# EAGLE board PCB-CMB-6 (EAGLE 7.3.0), part 1 of 2
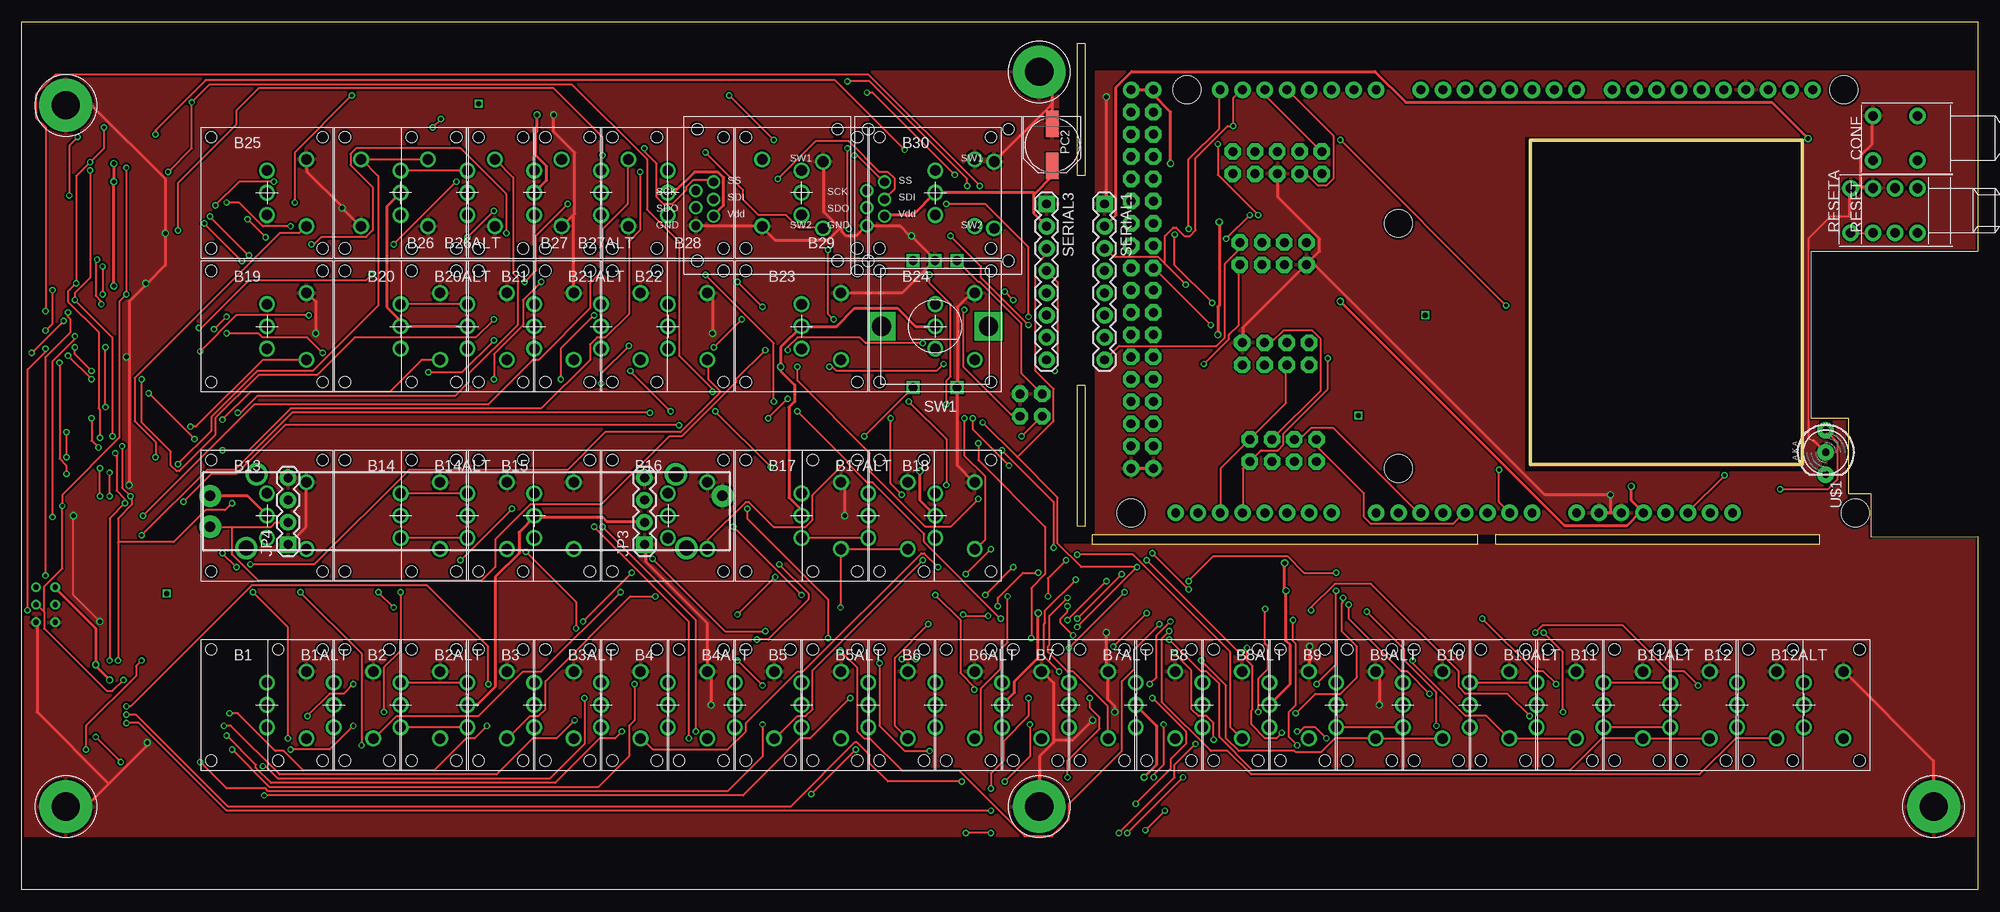
[diagram p0: board, top side]
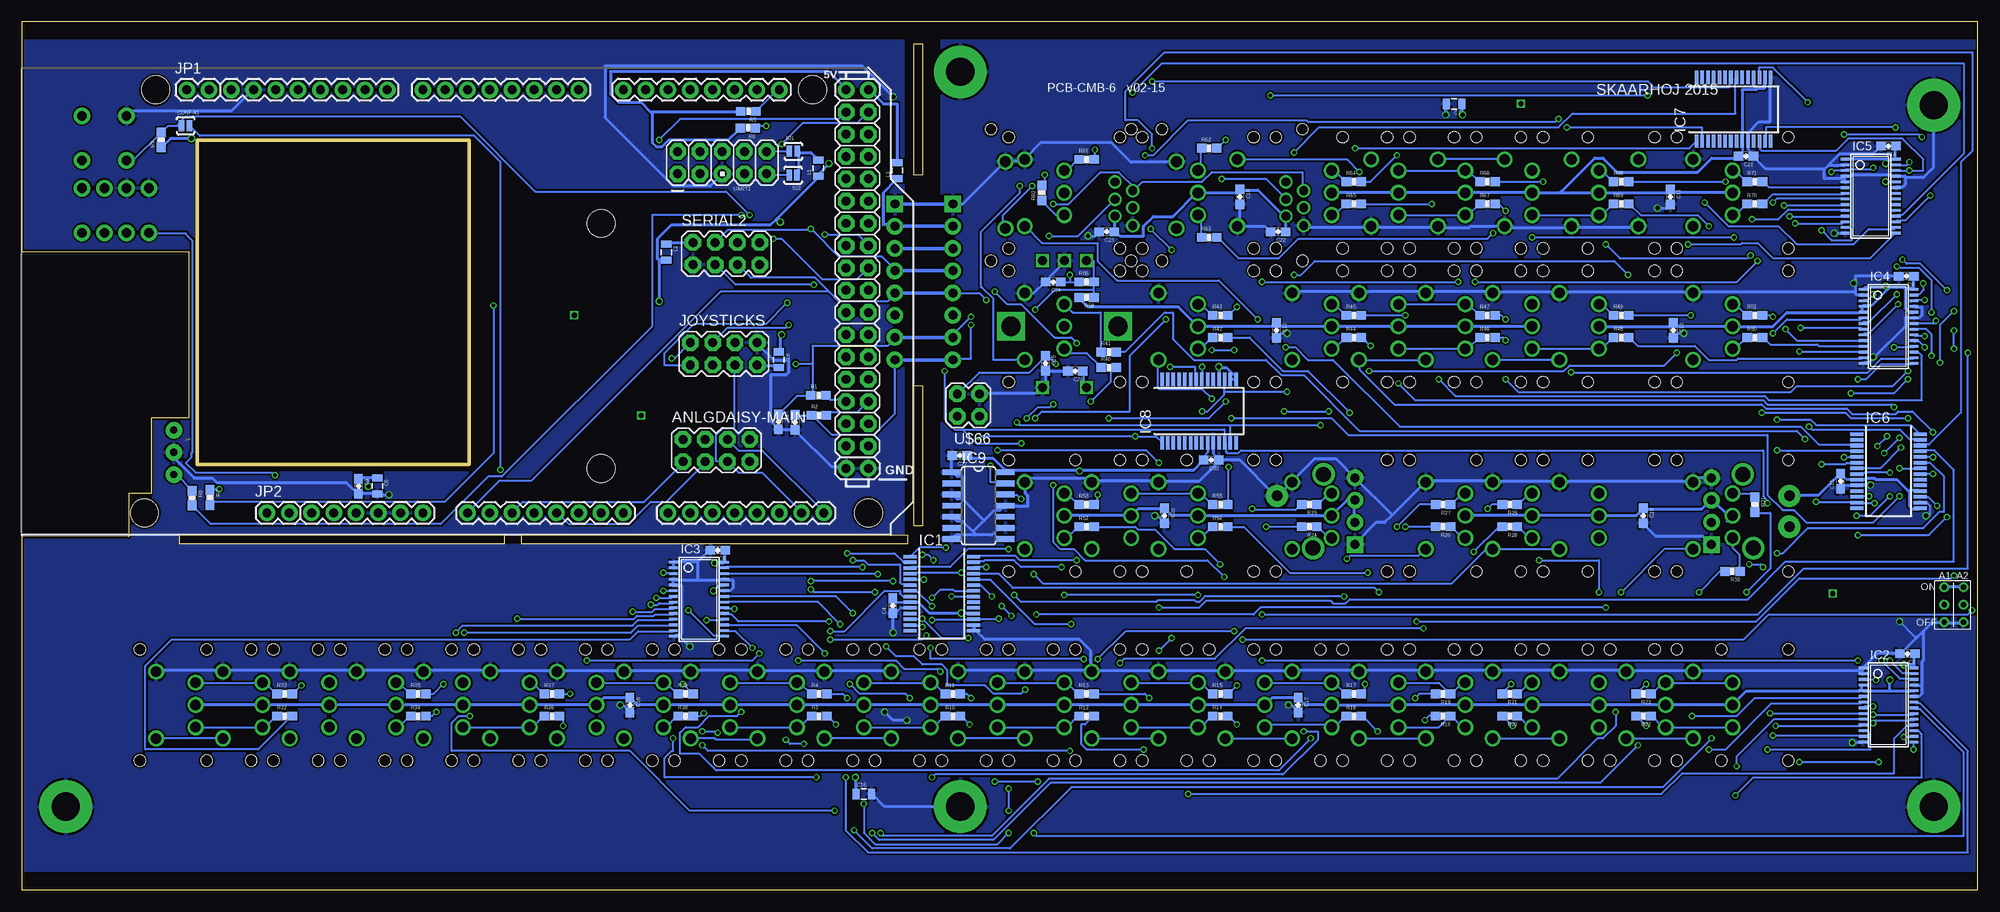
[diagram p1: board, bottom side, seen from below]

Size 223 x 99 mm. Coordinates in mm from the lower left corner, seen from the top.
Outline: 0,0 0,99 223,99 223,72.82 204,72.82 204,53.82 208.28,53.82 208.28,45.22 210.82,45.2 210.82,40.27 223,40.3 223,0 0,0
Copper layers (1*16): Top 0.035mm / dielectric 1.5mm / Bottom 0.035mm
Design rules "Fusion_eagle_rule_v1.1": minimum track width 6mil, minimum drill 12mil, track to track 6mil, track to pad 6mil, pad to pad 6mil, via to via 6mil, smd to smd 0mil, copper to edge 10mil, drill to drill 10mil, minimum pad ring 10mil, minimum via ring 6mil, stop-mask expansion 2mil, vias tented up to drill 100mil, thermal gap 10mil
Net classes: 0 default: width 0.203 mm, drill 0.406 mm, clearance 0.203 mm; 1 Power: width 0.356 mm, drill 0.508 mm, clearance 0.203 mm
tRestrict: area 0,-0.5 to 223,6; area 0,93.5 to 223,99.5; area 118.3,39.5 to 122.3,99.5; area 121,39.5 to 205,40.5; area 171.4,47.8 to 203.2,85.9
bRestrict: area 0,97 to 223,99.5; area 0,-0.5 to 223,2; area 118.3,39.5 to 122.3,99.5; area 121,39.5 to 205,40.5; area 171.4,47.8 to 203.2,85.9
Milling: area 168,39.5 to 205,40.5; area 120.3,81.5 to 121.3,96.5; area 120.3,41.5 to 121.3,57.5; area 122,39.5 to 166,40.5; 4 lines

## Footprints (pad centres in the part's own frame; a part is rotated, then mirrored left to right if it is on the bottom)
2X4 = drill 1.016 pad 1.88 octagon: 1 -3.81,-1.27; 2 -3.81,1.27; 3 -1.27,-1.27; 4 -1.27,1.27; 5 1.27,-1.27; 6 1.27,1.27; 7 3.81,-1.27; 8 3.81,1.27
LP11 = drill 1.2: COM 0,0; P$2 0,2.54; P$3 0,-2.54; P$4 4.5,3.81; P$5 4.5,-3.81 | hole 1.3: -6.35,6.35; 6.35,6.35; 6.35,-6.35; -6.35,-6.35
0603-CAP = smd 1.1 x 1: 1 -0.85,0; 2 0.85,0
0805 = smd 0.8 x 1.2: 1 -0.9,0; 2 0.9,0
PUSHBUTTON = drill 1.1 pad 1.88: 1 2.54,2.54; 2 2.54,-2.54; 3 -2.54,2.54; 4 -2.54,-2.54
SJ_2S-NO = smd 0.635 x 1.27: 1 -0.45,0; 2 0.45,0
SSOP28 = smd 0.4 x 1.5: 1 -4.225,-3.625; 2 -3.575,-3.625; 3 -2.925,-3.625; 4 -2.275,-3.625; 5 -1.625,-3.625; 6 -0.975,-3.625; 7 -0.325,-3.625; 8 0.325,-3.625; 9 0.975,-3.625; 10 1.625,-3.625; 11 2.275,-3.625; 12 2.925,-3.625; 13 3.575,-3.625; 14 4.225,-3.625; 15 4.225,3.625; 16 3.575,3.625; 17 2.925,3.625; 18 2.275,3.625; 19 1.625,3.625; 20 0.975,3.625; 21 0.325,3.625; 22 -0.325,3.625; 23 -0.975,3.625; 24 -1.625,3.625; 25 -2.275,3.625; 26 -2.925,3.625; 27 -3.575,3.625; 28 -4.225,3.625
TSSOP28 = smd 0.305 x 0.991: 1 -4.225,-2.918; 2 -3.575,-2.918; 3 -2.925,-2.918; 4 -2.275,-2.918; 5 -1.625,-2.918; 6 -0.975,-2.918; 7 -0.325,-2.918; 8 0.325,-2.918; 9 0.975,-2.918; 10 1.625,-2.918; 11 2.275,-2.918; 12 2.925,-2.918; 13 3.575,-2.918; 14 4.225,-2.918; 15 4.225,2.918; 16 3.575,2.918; 17 2.925,2.918; 18 2.275,2.918; 19 1.625,2.918; 20 0.975,2.918; 21 0.325,2.918; 22 -0.325,2.918; 23 -0.975,2.918; 24 -1.625,2.918; 25 -2.275,2.918; 26 -2.925,2.918; 27 -3.575,2.918; 28 -4.225,2.918
SO14 = smd 0.66 x 2.032: 1 -3.81,-3.073; 2 -2.54,-3.073; 3 -1.27,-3.073; 4 0,-3.073; 5 1.27,-3.073; 6 2.54,-3.073; 7 3.81,-3.073; 8 3.81,3.073; 9 2.54,3.073; 10 1.27,3.073; 11 0,3.073; 12 -1.27,3.073; 13 -2.54,3.073; 14 -3.81,3.073
1X02 = drill 1.016 pad 1.88: 1 0,0; 2 2.54,0
1X04 = drill 1.016 pad 1.88 square: 1 0,0 | drill 1.016 pad 1.88: 2 2.54,0; 3 5.08,0; 4 7.62,0
PANASONIC_D = smd 3 x 1.4: + 2.4,0; - -2.4,0
SLIDER45 = drill 1.194 pad 2.54: 1 -29.21,1.75; 2A -29.21,-1.75; 3 29.21,1.75 | drill 1.702: P$1 -23.9,4.2; P$2 23.9,4.2; P$3 25.1,-4.2; P$4 -25.1,-4.2
0603-RES = smd 1.1 x 1: 1 -0.85,0; 2 0.85,0
1X08 = drill 1.016 pad 1.88 square: 1 0,0 | drill 1.016 pad 1.88: 2 2.54,0; 3 5.08,0; 4 7.62,0; 5 10.16,0; 6 12.7,0; 7 15.24,0; 8 17.78,0
SMART_SWITCH = drill 1.2: 1 6.35,3.81; 2 6.35,-3.81 | drill 1: 3 -8.153,-3.48; 4 -6.147,-2.413; 5 -8.153,-1.422; 6 -6.147,-0.483; 7 -8.153,0.508; 8 -6.147,1.499 | hole 1.3: -8.001,7.506; 8.001,7.506; 8.001,-7.506; -8.001,-7.506
ALPS_EC12E_SW = drill 1 square: A -2.5,-7.5; B 2.5,-7.5; C 0,-7.5; D -2.5,7; E 2.5,7 | drill 2.2 square: GND1 -6.1,0; GND2 6.1,0
ARDUINO_MEGA = drill 1.016 pad 1.88: 0 63.5,50.8; 1 60.96,50.8; 2 58.42,50.8; 3 55.88,50.8; 3.3V 35.56,2.54; 4 53.34,50.8; 5 50.8,50.8; 5V@0 38.1,2.54; 5V@1 93.98,50.8; 5V@2 96.52,50.8; 6 48.26,50.8; 7 45.72,50.8; 8 41.656,50.8; 9 39.116,50.8; 10 36.576,50.8; 11 34.036,50.8; 12 31.496,50.8; 13 28.956,50.8; 14 68.58,50.8; 15 71.12,50.8; 16 73.66,50.8; 17 76.2,50.8; 18 78.74,50.8; 19 81.28,50.8; 20 83.82,50.8; 21 86.36,50.8; A0 50.8,2.54; A1 53.34,2.54; A2 55.88,2.54; A3 58.42,2.54; A4 60.96,2.54; A5 63.5,2.54; A6 66.04,2.54; A7 68.58,2.54; A8 73.66,2.54; A9 76.2,2.54; A10 78.74,2.54; A11 81.28,2.54; A12 83.82,2.54; A13 86.36,2.54; A14 88.9,2.54; A15 91.44,2.54; AREF 23.876,50.8; GND@0 40.64,2.54; GND@1 43.18,2.54; GND@2 93.98,7.62; GND@3 96.52,7.62; GND@4 26.416,50.8; RESET 33.02,2.54; VIN 45.72,2.54 | drill 1.016 pad 1.88 octagon: 22 93.98,48.26; 23 96.52,48.26; 24 93.98,45.72; 25 96.52,45.72; 26 93.98,43.18; 27 96.52,43.18; 28 93.98,40.64; 29 96.52,40.64; 30 93.98,38.1; 31 96.52,38.1; 32 93.98,35.56; 33 96.52,35.56; 34 93.98,33.02; 35 96.52,33.02; 36 93.98,30.48; 37 96.52,30.48; 38 93.98,27.94; 39 96.52,27.94; 40 93.98,25.4; 41 96.52,25.4; 42 93.98,22.86; 43 96.52,22.86; 44 93.98,20.32; 45 96.52,20.32; 46 93.98,17.78; 47 96.52,17.78; 48 93.98,15.24; 49 96.52,15.24; 50 93.98,12.7; 51 96.52,12.7; 52 93.98,10.16; 53 96.52,10.16 | hole 3.2: 15.24,50.8; 13.97,2.54; 66.04,35.56; 66.04,7.62; 90.17,50.8; 96.52,2.54
LED5MM-BICOLOR = drill 0.813 pad 1.88: A2 2.54,0; A3 -2.54,0; K1 0,0
3.2MMPAD6MM = drill 3.2 pad 6: P$1 0,0
2BITADDR = drill 0.6: A1 0,0; A2 2.2,0; H2 0,2; H3 2.2,2; L2 0,-2; L3 2.2,-2
2X2 = drill 1.016 pad 1.88 octagon: 1 -3.81,-1.27; 2 -3.81,1.27; 3 -1.27,-1.27; 4 -1.27,1.27
AVR_ICSP = drill 1.016 pad 1.88 octagon: 1 -1.27,5.08; 2 1.27,5.08; 3 -1.27,2.54; 4 1.27,2.54; 5 -1.27,0; 6 1.27,0; 7 -1.27,-2.54; 8 1.27,-2.54; 9 -1.27,-5.08; 10 1.27,-5.08

## Placement (x,y rotation side)
ANLGDAISY-MAIN  M04X2  [2X4]  143.82,50.12 0 bottom
B1  LP11-B"  [LP11]  27.94,21.09 0 top
B1ALT  LP11-B"  [LP11]  35.56,21.09 0 top
B2  LP11-B"  [LP11]  43.18,21.09 0 top
B2ALT  LP11-B"  [LP11]  50.8,21.09 0 top
B3  LP11-B"  [LP11]  58.42,21.09 0 top
B3ALT  LP11-B"  [LP11]  66.04,21.09 0 top
B4  LP11-B"  [LP11]  73.66,21.09 0 top
B4ALT  LP11-B"  [LP11]  81.28,21.09 0 top
B5  LP11-B"  [LP11]  88.9,21.09 0 top
B5ALT  LP11-B"  [LP11]  96.52,21.09 0 top
B6  LP11-B"  [LP11]  104.14,21.09 0 top
B6ALT  LP11-B"  [LP11]  111.76,21.09 0 top
B7  LP11-B"  [LP11]  119.38,21.09 0 top
B7ALT  LP11-B"  [LP11]  127,21.09 0 top
B8  LP11-B"  [LP11]  134.62,21.09 0 top
B8ALT  LP11-B"  [LP11]  142.24,21.09 0 top
B9  LP11-B"  [LP11]  149.86,21.09 0 top
B9ALT  LP11-B"  [LP11]  157.48,21.09 0 top
B10  LP11-B"  [LP11]  165.1,21.09 0 top
B10ALT  LP11-B"  [LP11]  172.72,21.09 0 top
B11  LP11-B"  [LP11]  180.34,21.09 0 top
B11ALT  LP11-B"  [LP11]  187.96,21.09 0 top
B12  LP11-B"  [LP11]  195.58,21.09 0 top
B12ALT  LP11-B"  [LP11]  203.2,21.09 0 top
B13  LP11-B"  [LP11]  27.94,42.68 0 top
B14  LP11-B"  [LP11]  43.18,42.68 0 top
B14ALT  LP11-B"  [LP11]  50.8,42.68 0 top
B15  LP11-B"  [LP11]  58.42,42.68 0 top
B16  LP11-B"  [LP11]  73.66,42.68 0 top
B17  LP11-B"  [LP11]  88.9,42.68 0 top
B17ALT  LP11-B"  [LP11]  96.52,42.68 0 top
B18  LP11-B"  [LP11]  104.14,42.68 0 top
B19  LP11-B"  [LP11]  27.94,64.27 0 top
B20  LP11-B"  [LP11]  43.18,64.27 0 top
B20ALT  LP11-B"  [LP11]  50.8,64.27 0 top
B21  LP11-B"  [LP11]  58.42,64.27 0 top
B21ALT  LP11-B"  [LP11]  66.04,64.27 0 top
B22  LP11-B"  [LP11]  73.66,64.27 0 top
B23  LP11-B"  [LP11]  88.9,64.27 0 top
B24  LP11-B"  [LP11]  104.14,64.27 0 top
B25  LP11-B"  [LP11]  27.94,79.51 0 top
B26  LP11-B"  [LP11]  43.18,79.51 180 top
B26ALT  LP11-B"  [LP11]  50.8,79.51 180 top
B27  LP11-B"  [LP11]  58.42,79.51 180 top
B27ALT  LP11-B"  [LP11]  66.04,79.51 180 top
B28  LP11-B"  [LP11]  73.66,79.51 180 top
B29  LP11-B"  [LP11]  88.9,79.51 180 top
B30  LP11-B"  [LP11]  104.14,79.51 0 top
C1  220pF?  [0603-CAP]  136.75,53.39 270 bottom
C2  220pF?  [0603-CAP]  134.84,53.32 270 bottom
C3  100nF  [0603-CAP]  184.63,46.02 270 bottom
C4  100nF  [0603-CAP]  123.7,32.39 90 bottom
C5  100nF  [0603-CAP]  8,26.93 180 bottom
C6  22uF  [0805]  182.47,46.07 270 bottom
C7  22uF  [0805]  59.69,89.67 180 bottom
C8  100nF  [0603-CAP]  143.64,38.74 180 bottom
C9  100nF  [0603-CAP]  8.13,69.98 180 bottom
C10  100nF  [0603-CAP]  84.12,79.05 270 bottom
C11  100nF  [0603-CAP]  35.05,79.05 270 bottom
C12  100nF  [0603-CAP]  79.96,63.81 270 bottom
C13  100nF  [0603-CAP]  34.7,63.81 270 bottom
C14  100nF  [0603-CAP]  10.16,84.84 180 bottom
C15  100nF  [0603-CAP]  15.62,46.62 90 bottom
C16  22uF  [0805]  127,10.93 0 bottom
C17  100nF  [0603-CAP]  77.47,21.09 270 bottom
C18  100nF  [0603-CAP]  153.67,21.09 270 bottom
C19  100nF  [0603-CAP]  38.1,42.68 270 bottom
C20  100nF  [0603-CAP]  92.71,42.68 270 bottom
C21  100nF  [0603-CAP]  26.42,83.7 180 bottom
C22  100nF  [0603-CAP]  79.76,75.06 180 bottom
C23  100nF  [0603-CAP]  99.31,75.06 180 bottom
C24  10nF  [0603-CAP]  105.41,69.35 180 bottom
C25  10nF  [0603-CAP]  106.3,60.08 270 bottom
C26  10nF  [0603-CAP]  102.87,59.19 180 bottom
C27  100nF  [0603-CAP]  116.08,49.54 180 bottom
C30  100nF  [0603-CAP]  87.38,49.03 180 bottom
CONF  [PUSHBUTTON]  213.6,85.75 90 top
CONF-A1  SOLDERJUMPERNO  [SJ_2S-NO]  204.34,87.16 0 bottom
IC1  MCP23017SS  [SSOP28]  118.11,33.79 270 bottom
IC2  PCA9685  [TSSOP28]  10.16,21.09 270 bottom
IC3  PCA9685  [TSSOP28]  145.8,33.16 270 bottom
IC4  PCA9685  [TSSOP28]  10.16,64.27 270 bottom
IC5  PCA9685  [TSSOP28]  12.19,79.13 270 bottom
IC6  MCP23017SS  [SSOP28]  10.16,47.76 270 bottom
IC7  MCP23017SS  [SSOP28]  27.81,89.03 0 bottom
IC8  MCP23017SS  [SSOP28]  88.77,54.62 0 bottom
IC9  74HCT14D  [SO14]  113.92,43.82 270 bottom
JOYSTICKS  M04X2  [2X4]  142.97,61.14 0 bottom
JP1  [1X02]  204.2,91.26 0 bottom
JP2  [1X02]  195.06,43 0 bottom
JP3  [1X04]  70.99,39.38 90 top
JP4  [1X04]  30.35,39.38 90 top
L1  [0805]  132.19,82.31 90 bottom
L2  [0805]  149.5,72.73 270 bottom
L3  [0805]  123.19,82.05 90 bottom
L6  [0805]  136.67,60.47 270 bottom
PC2  47u  [PANASONIC_D]  117.47,84.97 270 top
POT1  SLIDER45  [SLIDER45]  50.67,43.19 0 top
R1  ?  [0603-RES]  132.18,56.43 0 bottom
R2  ?  [0603-RES]  132.12,54.14 0 bottom
R3  270  [0603-RES]  132.08,19.82 0 bottom
R4  270  [0603-RES]  132.08,22.36 0 bottom
R5  1K5  [0603-RES]  140.16,88.8 180 bottom
R6  1K5  [0603-RES]  140.22,86.89 180 bottom
R7  270R  [0603-RES]  201.57,44.76 270 bottom
R8  270R  [0603-RES]  203.6,44.7 270 bottom
R9  10K  [0603-RES]  207.12,85.56 90 bottom
R10  270  [0603-RES]  116.84,19.82 0 bottom
R11  270  [0603-RES]  116.84,22.36 0 bottom
R12  270  [0603-RES]  101.6,19.82 0 bottom
R13  270  [0603-RES]  101.6,22.36 0 bottom
R14  270  [0603-RES]  86.36,19.82 0 bottom
R15  270  [0603-RES]  86.36,22.36 0 bottom
R16  270  [0603-RES]  71.12,19.82 0 bottom
R17  270  [0603-RES]  71.12,22.36 0 bottom
R18  270  [0603-RES]  60.96,19.82 180 bottom
R19  270  [0603-RES]  60.96,22.36 180 bottom
R20  270  [0603-RES]  53.34,19.82 180 bottom
R21  270  [0603-RES]  53.34,22.36 180 bottom
R22  270  [0603-RES]  38.1,19.82 180 bottom
R23  270  [0603-RES]  38.1,22.36 180 bottom
R24  270  [0603-RES]  76.2,41.41 180 bottom
R25  270  [0603-RES]  76.2,43.95 180 bottom
R26  270  [0603-RES]  60.96,41.41 180 bottom
R27  270  [0603-RES]  60.96,43.95 180 bottom
R28  270  [0603-RES]  53.34,41.41 180 bottom
R29  270  [0603-RES]  53.34,43.95 180 bottom
R30  270  [0603-RES]  27.94,36.33 180 bottom
R31  270  [0603-RES]  25.4,43.95 270 bottom
R32  270  [0603-RES]  193.04,19.82 0 bottom
R33  270  [0603-RES]  193.04,22.36 0 bottom
R34  270  [0603-RES]  177.8,19.82 0 bottom
R35  270  [0603-RES]  177.8,22.36 0 bottom
R36  270  [0603-RES]  162.56,19.82 0 bottom
R37  270  [0603-RES]  162.56,22.36 0 bottom
R38  270  [0603-RES]  147.32,19.82 0 bottom
R39  270  [0603-RES]  147.32,22.36 0 bottom
R40  270  [0603-RES]  99.06,59.57 0 bottom
R41  270  [0603-RES]  99.06,61.35 0 bottom
R42  270  [0603-RES]  86.36,63 0 bottom
R43  270  [0603-RES]  86.36,65.54 0 bottom
R44  270  [0603-RES]  71.12,63 0 bottom
R45  270  [0603-RES]  71.12,65.54 0 bottom
R46  270  [0603-RES]  55.88,63 0 bottom
R47  270  [0603-RES]  55.88,65.54 0 bottom
R48  270  [0603-RES]  40.64,63 0 bottom
R49  270  [0603-RES]  40.64,65.54 0 bottom
R50  270  [0603-RES]  25.4,63 0 bottom
R51  270  [0603-RES]  25.4,65.54 0 bottom
R52  270  [0603-RES]  101.6,41.41 0 bottom
R53  270  [0603-RES]  101.6,43.95 0 bottom
R54  270  [0603-RES]  86.36,41.41 0 bottom
R55  270  [0603-RES]  86.36,43.95 0 bottom
R56  0R  [0603-RES]  101.6,69.35 0 bottom
R58  100K  [0603-RES]  101.6,67.57 180 bottom
R60  270  [0603-RES]  106.68,79.51 90 bottom
R61  270  [0603-RES]  101.6,83.32 0 bottom
R62  270  [0603-RES]  87.63,84.59 0 bottom
R63  270  [0603-RES]  87.63,74.43 0 bottom
R64  270  [0603-RES]  71.12,80.78 0 bottom
R65  270  [0603-RES]  71.12,78.24 0 bottom
R66  270  [0603-RES]  55.88,80.78 0 bottom
R67  270  [0603-RES]  55.88,78.24 0 bottom
R68  270  [0603-RES]  40.64,80.78 0 bottom
R69  270  [0603-RES]  40.64,78.24 0 bottom
R70  270  [0603-RES]  25.4,78.24 0 bottom
R71  270  [0603-RES]  25.4,80.78 0 bottom
RESET  [PUSHBUTTON]  213.6,77.49 90 top
RESETA  [PUSHBUTTON]  211.06,77.49 90 top
SERIAL1  [1X08]  123.44,78.24 270 top
SERIAL2  M04X2  [2X4]  142.68,72.57 0 bottom
SERIAL3  [1X08]  116.84,78.24 270 top
SJ1  SOLDERJUMPERNO  [SJ_2S-NO]  135.03,84.24 0 bottom
SJ2  SOLDERJUMPERNO  [SJ_2S-NO]  135.07,81.51 180 bottom
SSW1  SMART_SWITCHSMART_SWITCH_8PIN  [SMART_SWITCH]  85,79.25 0 top
SSW2  SMART_SWITCHSMART_SWITCH_8PIN  [SMART_SWITCH]  104.5,79.25 0 top
SW1  EC12E_SW  [ALPS_EC12E_SW]  104.12,64.29 180 top
U1  ARDUINO-MEGAFULL  [ARDUINO_MEGA]  223,40.46 0 bottom
U$1  LEDBICOLOR-AKA  [LED5MM-BICOLOR]  205.69,49.91 270 top
U$7  GNDPAD6MM  [3.2MMPAD6MM]  218,9.5 0 top
U$15  GNDPAD6MM  [3.2MMPAD6MM]  116,9.5 0 top
U$18  GNDPAD6MM  [3.2MMPAD6MM]  116,93.31 0 top
U$20  GNDPAD6MM  [3.2MMPAD6MM]  5,9.5 0 top
U$21  GNDPAD6MM  [3.2MMPAD6MM]  5,89.5 0 top
U$34  2BITADDR  [2BITADDR]  3.81,32.52 0 bottom
U$66  M02X2  [2X2]  117.62,55.29 180 bottom
UART1  M05X2PTH  [AVR_ICSP]  143.15,82.95 90 bottom

## Library data of the parts
ANLGDAISY-MAIN C1-C27 C30 CONF-A1 JOYSTICKS JP1-JP4 L1-L3 L6 R1-R56 R58 R60-R71 SERIAL1-SERIAL3 SJ1 SJ2 UART1 = SparkFun
B1 B1ALT B2 B2ALT B3 B3ALT B4 B4ALT B5 B5ALT B6 B6ALT B7 B7ALT B8 B8ALT B9 B9ALT B10 B10ALT B11 B11ALT B12 B12ALT B13 B14 B14ALT B15-B17 B17ALT B18-B20 B20ALT B21 B21ALT B22-B26 B26ALT B27 B27ALT B28-B30 CONF POT1 RESET RESETA SSW1 SSW2 U1 U$1 U$7 U$15 U$18 U$20 U$21 U$34 U$66 = SKAARHOJ
IC1 IC6-IC8 = microchip; MF: MICROCHIP; MPN: MCP23017-E/SS; OC_FARNELL: 1467674; OC_NEWARK: 31K2960
IC2-IC5 = wsmith
IC9 = 74xx-eu
PC2 = rcl
SW1 = switch-alps; MPN: EC12E2424407; OC_FARNELL: 1520813; OC_NEWARK: 74M1068

## Nets
5V [Power]: B1.COM B1ALT.COM B2.COM B2ALT.COM B3.COM B3ALT.COM B4.COM B4ALT.COM B5.COM B5ALT.COM B6.COM B6ALT.COM B7.COM B7ALT.COM B8.COM B8ALT.COM B9.COM B9ALT.COM B10.COM B10ALT.COM B11.COM B11ALT.COM B12.COM B12ALT.COM B13.COM B14.COM B14ALT.COM B15.COM B16.COM B17.COM B17ALT.COM B18.COM B19.COM B20.COM B20ALT.COM B21.COM B21ALT.COM B22.COM B23.COM B24.COM B25.COM B26.COM B26ALT.COM B27.COM B27ALT.COM B28.COM B29.COM B30.COM C4.2 C5.1 C7.1 C8.1 C9.1 C10.1 C11.1 C12.1 C13.1 C14.1 C15.2 C16.1 C17.1 C18.1 C19.1 C20.1 C21.2 C22.1 C23.1 C27.1 C30.2 IC1.9 IC1.18 IC2.4 IC2.5 IC2.24 IC2.28 IC3.24 IC3.28 IC4.1 IC4.4 IC4.5 IC4.24 IC4.28 IC5.1 IC5.24 IC5.28 IC6.9 IC6.15 IC6.18 IC7.9 IC7.16 IC7.18 IC8.9 IC8.15 IC8.16 IC8.18 IC9.14 JP3.2 JP3.3 JP4.3 L3.1 PC2.+ POT1.1 R9.1 R58.2 SERIAL1.2 SERIAL3.2 SSW1.4 SSW2.4 U$34.H2 U$34.H3
5V_RAW [Power]: C3.1 C6.1 L1.1 L2.2 L3.2 L6.1 R5.2 R6.2 U1.5V@0 U1.5V@1 U1.5V@2
A0: JP4.2 POT1.2A SERIAL1.5 SERIAL2.5 SERIAL3.5 U1.A0
A1: CONF-A1.2 U1.A1
A2: IC1.17 IC2.3 IC3.3 IC4.3 IC5.3 IC6.17 IC7.17 IC8.17 U$34.A2
A3: ANLGDAISY-MAIN.2 U1.A3
A4: ANLGDAISY-MAIN.3 U1.A4
A5: ANLGDAISY-MAIN.4 U1.A5
A6: U1.A6
A7: U1.A7
A8: U1.A8
A9: U1.A9
A10: U1.A10
A11: U1.A11
A12: ANLGDAISY-MAIN.7 JOYSTICKS.2 U1.A12
A13: ANLGDAISY-MAIN.8 JOYSTICKS.3 U1.A13
A14: ANLGDAISY-MAIN.5 JOYSTICKS.5 U1.A14
A15: ANLGDAISY-MAIN.6 JOYSTICKS.6 U1.A15
AD0: C26.1 IC8.1 SW1.E U$66.4
AN2: ANLGDAISY-MAIN.1 U1.A2
D2: IC8.21 IC9.12
D3: C25.1 IC8.22 SW1.A U$66.3
D6: U1.6
D7: U1.7
D8: U1.8
D9: U1.9
D22: R7.2 U1.22
D23: R8.2 U1.23
D24: U1.24
D37: CONF-A1.1 CONF.3 R9.2 U1.37
EXT1: U1.25
EXT2: U1.26
EXT3: U1.27
EXT4: U1.28
EXT5: U1.29
EXT6: U1.30
EXT7: U1.31
EXT8: U1.32
GND [Power]: B1.P$4 B1ALT.P$4 B2.P$4 B2ALT.P$4 B3.P$4 B3ALT.P$4 B4.P$4 B4ALT.P$4 B5.P$4 B5ALT.P$4 B6.P$4 B6ALT.P$4 B7.P$4 B7ALT.P$4 B8.P$4 B8ALT.P$4 B9.P$4 B9ALT.P$4 B10.P$4 B10ALT.P$4 B11.P$4 B11ALT.P$4 B12.P$4 B12ALT.P$4 B13.P$4 B14.P$4 B14ALT.P$4 B15.P$4 B16.P$4 B17.P$4 B17ALT.P$4 B18.P$4 B19.P$4 B20.P$4 B20ALT.P$4 B21.P$4 B21ALT.P$4 B22.P$4 B23.P$4 B24.P$4 B25.P$4 B26.P$4 B26ALT.P$4 B27.P$4 B27ALT.P$4 B28.P$4 B29.P$4 B30.P$4 C1.2 C2.2 C3.2 C4.1 C5.2 C6.2 C7.2 C8.2 C9.2 C10.2 C11.2 C12.2 C13.2 C14.2 C15.1 C16.2 C17.2 C18.2 C19.2 C20.2 C21.1 C22.2 C23.2 C24.2 C25.2 C26.2 C27.2 C30.1 CONF.1 IC1.10 IC1.15 IC1.16 IC2.1 IC2.2 IC2.14 IC2.23 IC2.25 IC3.1 IC3.2 IC3.4 IC3.5 IC3.14 IC3.23 IC3.25 IC4.2 IC4.14 IC4.23 IC4.25 IC5.2 IC5.4 IC5.5 IC5.14 IC5.23 IC5.25 IC6.10 IC6.16 IC7.10 IC7.15 IC8.10 IC9.1 IC9.3 IC9.5 IC9.7 IC9.9 IC9.11 JOYSTICKS.8 JP3.1 JP3.4 JP4.1 JP4.4 PC2.- POT1.3 RESET.1 RESETA.1 SERIAL1.1 SERIAL2.1 SERIAL3.1 SSW1.1 SSW1.3 SSW2.1 SSW2.3 SW1.C SW1.D U1.GND@0 U1.GND@1 U1.GND@2 U1.GND@3 U1.GND@4 U$1.K1 U$7.P$1 U$15.P$1 U$18.P$1 U$20.P$1 U$21.P$1 U$34.L2 U$34.L3 U$66.1 UART1.5
GPA0: B8.P$5 B8ALT.P$5 IC1.21
GPA0_2: IC7.21 SSW1.2
GPA1: B7.P$5 B7ALT.P$5 IC1.22
GPA1_2: IC7.22 SSW2.2
GPA2: B6.P$5 B6ALT.P$5 IC1.23
GPA3: B5.P$5 B5ALT.P$5 IC1.24
GPA4: B1.P$5 B1ALT.P$5 IC1.25
GPA5: B2.P$5 B2ALT.P$5 IC1.26
GPA6: B3.P$5 B3ALT.P$5 IC1.27
GPA7: B4.P$5 B4ALT.P$5 IC1.28
GPA8: B16.P$5 IC1.1
GPA9: B15.P$5 IC1.2
GPA10: B14.P$5 B14ALT.P$5 IC1.3
GPA11: B13.P$5 IC1.4
GPA12: B9.P$5 B9ALT.P$5 IC1.5
GPA13: B10.P$5 B10ALT.P$5 IC1.6
GPA14: B11.P$5 B11ALT.P$5 IC1.7
GPA15: B12.P$5 B12ALT.P$5 IC1.8
GPA16: B24.P$5 IC6.21
GPA17: B23.P$5 IC6.22
GPA18: B22.P$5 IC6.23
GPA19: B21.P$5 B21ALT.P$5 IC6.24
GPA20: B17.P$5 B17ALT.P$5 IC6.25
GPA21: B18.P$5 IC6.26
GPA22: B19.P$5 IC6.27
GPA23: B20.P$5 B20ALT.P$5 IC6.28
GPA24: IC6.1
GPA25: IC6.2
GPA26: B30.P$5 IC6.3
GPA27: B29.P$5 IC6.4
GPA28: B25.P$5 IC6.5
GPA29: B26.P$5 B26ALT.P$5 IC6.6
GPA30: B27.P$5 B27ALT.P$5 IC6.7
GPA31: B28.P$5 IC6.8
GPB0: IC7.1 SSW1.8
GPB1: IC7.2 SSW2.8
GPIO1-1: U1.33
GPIO1-2: U1.34
GPIO2-1: U1.38
GPIO2-2: U1.39
GPIO3-1: U1.40
GPIO3-2: U1.41
I2C_SCL: IC1.12 IC2.26 IC3.26 IC4.26 IC5.26 IC6.12 IC7.12 IC8.12 R5.1 SERIAL1.4 SERIAL2.4 SERIAL3.4 U1.21
I2C_SDA: IC1.13 IC2.27 IC3.27 IC4.27 IC5.27 IC6.13 IC7.13 IC8.13 R6.1 SERIAL1.3 SERIAL2.3 SERIAL3.3 U1.20
L0: B1.P$2 B1ALT.P$2 R23.1
L1: B1.P$3 B1ALT.P$3 R22.1
L2: B2.P$2 B2ALT.P$2 R21.1
L3: B2.P$3 B2ALT.P$3 R20.1
L4: B3.P$2 B3ALT.P$2 R19.1
L5: B3.P$3 B3ALT.P$3 R18.1
L6: B4.P$2 B4ALT.P$2 R17.1
L7: B4.P$3 B4ALT.P$3 R16.1
L8: B5.P$2 B5ALT.P$2 R15.1
L9: B5.P$3 B5ALT.P$3 R14.1
L10: B6.P$2 B6ALT.P$2 R13.1
L11: B6.P$3 B6ALT.P$3 R12.1
L12: B7.P$2 B7ALT.P$2 R11.1
L13: B7.P$3 B7ALT.P$3 R10.1
L14: B8.P$2 B8ALT.P$2 R4.1
L15: B8.P$3 B8ALT.P$3 R3.1
L16: B9.P$2 B9ALT.P$2 R39.1
L17: B9.P$3 B9ALT.P$3 R38.1
L18: B10.P$2 B10ALT.P$2 R37.1
L19: B10.P$3 B10ALT.P$3 R36.1
L20: B11.P$2 B11ALT.P$2 R35.1
L21: B11.P$3 B11ALT.P$3 R34.1
L22: B12.P$2 B12ALT.P$2 R33.1
L23: B12.P$3 B12ALT.P$3 R32.1
L24: B13.P$2 R31.1
L25: B13.P$3 R30.1
L26: B14.P$2 B14ALT.P$2 R29.1
L27: B14.P$3 B14ALT.P$3 R28.1
L28: B15.P$2 R27.1
L29: B15.P$3 R26.1
L30: B16.P$2 R25.1
L31: B16.P$3 R24.1
L32: B17.P$2 B17ALT.P$2 R55.1
L33: B17.P$3 B17ALT.P$3 R54.1
L34: B18.P$2 R53.1
L35: B18.P$3 R52.1
L36: B19.P$2 R51.1
L37: B19.P$3 R50.1
L38: B20.P$2 B20ALT.P$2 R49.1
L39: B20.P$3 B20ALT.P$3 R48.1
L40: B21.P$2 B21ALT.P$2 R47.1
L41: B21.P$3 B21ALT.P$3 R46.1
L42: B22.P$2 R45.1
L43: B22.P$3 R44.1
L44: B23.P$2 R43.1
L45: B23.P$3 R42.1
L46: B24.P$2 R41.1
L47: B24.P$3 R40.1
L48: B25.P$2 R71.1
L49: B25.P$3 R70.1
L50: B26.P$2 B26ALT.P$2 R69.1
L51: B26.P$3 B26ALT.P$3 R68.1
L52: B27.P$2 B27ALT.P$2 R67.1
L53: B27.P$3 B27ALT.P$3 R66.1
L54: B28.P$2 R65.1
L55: B28.P$3 R64.1
L56: B29.P$2 R63.1
L57: B29.P$3 R62.1
L58: B30.P$2 R61.1
L59: B30.P$3 R60.1
MOSI: C2.1 R2.1 SERIAL1.8 SERIAL2.8 SERIAL3.8 SSW1.6 SSW2.6
N$1 [Power]: L2.1 SERIAL2.2
N$2: R56.2 R58.1 SW1.B U$66.2
N$3 [Power]: L1.2 SJ1.2 SJ2.1
N$4: IC2.13 R16.2
N$5: IC2.12 R17.2
N$6: IC2.11 R18.2
N$7 [Power]: JOYSTICKS.7 L6.2
N$8: IC2.10 R19.2
N$9: SJ2.2 UART1.9
N$10: SJ1.1 UART1.10
N$11: R1.2 U1.48
N$12: IC2.9 R20.2
N$13: IC2.8 R21.2
N$14: R2.2 U1.49
N$15: R7.1 U$1.A3
N$16: IC2.7 R22.2
N$17: R8.1 U$1.A2
N$18: U1.53
N$19: U1.52
N$20: U1.51
N$21: U1.50
N$22: IC2.6 R23.2
N$23: IC2.15 R15.2
N$24: U1.47
N$25: U1.46
N$26: U1.45
N$27: U1.44
N$28: U1.43
N$29: U1.42
N$30: IC2.16 R14.2
N$31: IC2.17 R13.2
N$32: IC2.18 R12.2
N$33: IC2.19 R11.2
N$34: IC2.20 R10.2
N$35: IC2.21 R4.2
N$36: IC2.22 R3.2
N$37: IC3.13 R32.2
N$38: IC3.12 R33.2
N$39: IC3.11 R34.2
N$40: IC3.10 R35.2
N$41: IC3.9 R36.2
N$42: IC3.8 R37.2
N$43: IC3.7 R38.2
N$44: IC3.6 R39.2
N$45: IC3.15 R31.2
N$46: IC3.16 R30.2
N$47: IC3.17 R29.2
N$48: IC3.18 R28.2
N$49: IC3.19 R27.2
N$50: IC3.20 R26.2
N$51: IC3.21 R25.2
N$52: IC3.22 R24.2
N$53: IC4.13 R48.2
N$54: IC4.12 R49.2
N$55: IC4.11 R50.2
N$56: IC4.10 R51.2
N$57: IC4.9 R52.2
N$58: IC4.8 R53.2
N$59: IC4.7 R54.2
N$60: IC4.6 R55.2
N$61: IC4.15 R47.2
N$62: IC4.16 R46.2
N$63: IC4.17 R45.2
N$64: IC4.18 R44.2
N$65: IC4.19 R43.2
N$66: IC4.20 R42.2
N$67: IC4.21 R41.2
N$68: IC4.22 R40.2
N$69: IC5.13 R64.2
N$70: IC5.12 R65.2
N$71: IC5.11 R66.2
N$72: IC5.10 R67.2
N$73: IC5.9 R68.2
N$74: IC5.8 R69.2
N$75: IC5.7 R70.2
N$76: IC5.6 R71.2
N$77: IC5.15 R63.2
N$78: IC5.16 R62.2
N$79: IC5.17 R61.2
N$80: IC5.18 R60.2
N$124: C24.1 IC9.13 R56.1
RESET: RESET.3 RESETA.3 U1.RESET
RXD1: U1.19 UART1.2
RXD2: U1.17
RXD3: U1.15
SCLK: C1.1 R1.1 SERIAL1.7 SERIAL2.7 SERIAL3.7 SSW1.7 SSW2.7
SW1: JOYSTICKS.1 U1.35
SW2: JOYSTICKS.4 U1.36
TXD1: U1.18 UART1.3
TXD2: U1.16
TXD3: U1.14
VIN [Power]: U1.VIN

## Tracks (layer width: path | path; a pad name or v marks a point on that pad's centre or on a via)
5V  (via drill 0.51)
  Top 0.356: U$34.H2 3.81,34.42 8.41,29.82 v8.41,25.69 8.41,25.54 v10,23.95 | B8ALT.COM 144.62,23.47 144.62,27.92 144.15,28.39 v144.15,34.11 143.99,34.11 v143.99,37.28 | v127.95,12.84 129.38,14.26 129.38,18.71 B7ALT.COM | v115.89,31.57 115.89,26.49 113.19,23.79 113.19,22.52 B6ALT.COM | v102.39,47.76 102.39,44.43 B18.COM | B13.COM 25.72,44.9 21.59,44.9 POT1.1 | v10.48,82.84 v10.48,80.78 v10.48,68.87 | B24.COM 101.92,64.27 99.85,66.33 94.93,66.33 92.87,64.27 B23.COM 86.52,61.89 v86.52,59.67 86.52,59.19 88.11,57.6 88.11,55.7 87.47,55.06 87.47,44.74 88.9,43.31 B17.COM | B20ALT.COM B20.COM 43.18,64.91 41.59,66.49 41.59,77.92 B26.COM | v58.74,88.4 58.74,86.5 58.58,86.34 58.58,83.8 59.85,82.53 59.85,80.94 B27.COM | SSW2.4 98.42,76.97 101.6,76.97 B30.COM 115.41,79.51 115.49,79.43 | v203.68,85.7 199.55,89.83 157.8,89.83 154.31,93.32 126.52,93.32 124.78,91.58 124.78,76.97 123.51,75.7 SERIAL1.2 | PC2.+ 117.47,81.42 115.49,79.43 | 115.49,79.43 115.41,79.35 115.41,77.13 SERIAL3.2 | B28.COM 74.3,79.51 76.68,81.89 79.38,81.89 80.01,81.26 80.01,78.08 78.9,76.97 SSW1.4 | B2ALT.COM 51.91,21.09 53.98,23.15 53.98,35.7 56.67,38.39 56.67,40.77 58.42,42.52 B15.COM 58.58,42.52 66.2,42.52 66.67,42.05 70.96,42.05 JP3.2
  Bottom 0.305: C21.2 27.27,83.87 26.8,84.34 26.8,85.37 IC7.9 | IC6.9 14.94,46.78 C15.2 | C30.2 88.23,49.45 87.76,49.92 87.76,50.95 IC8.9 | IC1.9 123.27,32.81 C4.2
  Bottom 0.356: 7.3,25.69 7.3,26.8 C5.1 | 7.3,25.69 7.3,25.38 IC2.28 | v8.41,25.69 7.3,25.69 | U$34.H3 1.75,34.58 3.81,34.58 U$34.H2 | 10,22.68 13.02,22.68 IC2.5 | 10,22.68 7.3,22.68 IC2.24 | IC2.4 13.18,23.31 13.18,22.84 IC2.5 | IC2.5 13.34,22.84 13.49,22.68 26.35,22.68 B1.COM B1ALT.COM B2.COM B2ALT.COM B3.COM B3ALT.COM B4.COM 76.68,21.09 77.47,21.88 C17.1 77.63,21.88 80.49,21.88 B4ALT.COM B5.COM B5ALT.COM B6.COM B6ALT.COM B7.COM B7ALT.COM B8.COM B8ALT.COM B9.COM 152.88,21.09 153.67,21.88 C18.1 153.83,21.88 156.69,21.88 B9ALT.COM B10.COM B10ALT.COM B11.COM B11ALT.COM B12.COM B12ALT.COM | 10,22.68 v10,23.95 | C8.1 142.88,38.71 142.88,37.44 IC3.28 143.03,37.28 v143.99,37.28 | v144.15,34.11 143.51,34.74 143.03,34.74 IC3.24 | v127.95,12.84 127.95,10.93 C16.1 | IC1.18 114.62,31.57 v115.89,31.57 119.54,31.57 120.81,32.84 121.6,32.84 IC1.9 | C27.1 115.09,49.51 114.78,49.19 112.24,49.19 110.81,47.76 IC9.14 110.81,47.92 102.39,47.92 | 102.39,47.92 89.38,47.92 88.27,49.03 C30.2 | 71.12,44.43 JP3.3 | B18.COM B17ALT.COM 95.73,43.47 92.87,43.47 C20.1 92.71,43.47 91.92,42.68 B17.COM B16.COM 71.91,44.43 71.28,44.43 JP3.3 | v102.39,47.76 102.39,47.92 | 7.78,45.54 7.78,43.79 7.46,43.47 6.67,43.47 IC6.15 | 7.78,45.54 6.67,45.54 IC6.18 | C15.2 15.72,47.44 18.1,45.06 21.43,45.06 POT1.1 | 7.78,45.54 7.94,45.54 9.21,46.81 11.59,46.81 11.75,46.97 12.7,46.97 12.86,46.81 13.65,46.81 IC6.9 | 28.57,42.05 B13.COM 28.26,42.52 30.16,44.43 JP4.3 | 30.32,44.43 JP4.3 | C19.1 38.1,43.47 38.89,42.68 B14.COM B14ALT.COM B15.COM | 37.94,43.47 C19.1 | v10.48,80.78 9.37,80.78 IC5.24 | 10.08,83.24 10,83.32 9.37,83.32 IC5.28 9.37,83.48 9.37,84.75 C14.1
  Bottom 0.356: 10.08,83.24 v10.48,82.84 | IC5.1 15.08,83.32 10.16,83.32 10.08,83.24 | 8.26,68.56 8.26,66.33 7.78,65.86 7.3,65.86 IC4.24 | 7.3,68.56 8.26,68.56 | 7.3,68.56 IC4.28 | 10.16,68.72 8.26,68.72 8.26,68.56 | 10.16,68.72 10.48,68.72 | 10.48,68.72 12.86,68.72 13.02,68.56 IC4.1 | 7.3,68.56 7.3,69.98 C9.1 | 10.16,68.72 10.16,68.56 12.06,66.65 13.02,66.65 IC4.4 13.18,66.49 13.18,66.02 IC4.5 13.34,66.02 13.49,65.86 21.75,65.86 23.34,64.27 B19.COM 34.29,64.27 34.61,64.59 C13.1 34.77,64.59 35.08,64.27 B20.COM | v10.48,68.87 10.48,68.72 | IC8.16 85.09,58.24 84.61,58.24 IC8.15 84.45,58.4 85.57,59.51 86.52,59.51 | 86.52,59.51 86.52,58.4 IC8.18 | R58.2 102.39,67.44 101.44,66.49 91.12,66.49 B23.COM 79.69,64.27 C12.1 79.85,64.59 79.53,64.27 B22.COM B21ALT.COM B21.COM B20ALT.COM | v86.52,59.67 86.52,59.51 | v58.74,88.4 58.74,89.67 C7.1 | B28.COM B27ALT.COM B27.COM B26ALT.COM 47.47,79.51 | B25.COM 34.61,79.51 34.92,79.83 C11.1 35.08,79.83 35.4,79.51 B26.COM 47.47,79.51 | 25.24,91.42 24.29,91.42 24.29,92.53 IC7.16 | 25.24,91.42 25.56,91.73 25.56,92.53 IC7.18 | IC7.9 26.83,85.54 26.83,91.26 25.24,91.26 25.24,91.42 | C21.2 27.3,83.64 27.46,83.48 30.32,83.48 31.91,81.89 41.12,81.89 42.7,83.48 43.66,83.48 47.47,79.67 47.47,79.51 | C22.1 78.9,76.81 SSW1.4 79.06,76.81 82.07,79.83 83.98,79.83 C10.1 84.14,79.83 84.45,79.51 B29.COM 89.06,79.51 91.76,76.81 93.98,76.81 95.09,75.7 95.09,74.59 97.79,74.59 98.27,75.06 C23.1 98.42,75.06 98.42,76.81 SSW2.4 | v203.68,85.7 206.06,85.7 207.01,84.75 R9.1 | L3.1 123.19,81.1 124.78,79.51 124.78,75.86 123.51,75.86 SERIAL1.2 | JP3.2 71.12,42.05 71.12,44.27 JP3.3
  Bottom 0.356: JP4.3 30.48,44.43 31.43,43.47 37.78,43.47 C19.1
  Bottom 0.406: SERIAL3.2 SERIAL1.2
5V_RAW  (via drill 0.51)
  Top 0.356: U1.5V@2 126.52,91.26 128.91,91.26 U1.5V@1 129.06,91.1 129.06,90.62 130.97,88.72 v130.97,82.84 | v183.51,46.01 183.51,44.43 184.78,43.16 U1.5V@0 184.63,43.16 183.04,41.57 175.9,41.57 v150.34,67.13 | v136.37,63.32 136.37,66.49 136.53,66.65 v136.53,76.18
  Bottom 0.356: 151.13,88.72 151.13,85.22 150.65,84.75 150.02,84.75 149.22,85.54 142.4,85.54 141.13,86.81 R6.2 | 151.13,88.72 141.13,88.72 R5.2 | L3.2 123.19,89.67 124.78,89.67 126.36,91.26 U1.5V@2 | 151.13,88.72 151.29,88.72 152.4,89.83 154.94,89.83 155.89,90.78 155.89,93.32 130.97,93.32 129.06,91.42 U1.5V@1 | 183.51,46.97 182.56,46.97 C6.1 | 183.51,46.97 184.63,46.97 C3.1 | v183.51,46.01 183.51,46.97 | 136.92,76.57 137.64,75.86 148.91,75.86 150.5,74.27 150.5,71.89 150.34,71.89 | 136.92,76.57 132.24,81.26 L1.1 132.24,81.57 v130.97,82.84 | 150.34,71.89 149.54,71.89 L2.2 | v136.37,63.32 136.53,63.32 136.53,61.41 L6.1 | 136.92,76.57 v136.53,76.18 | 150.34,71.89 v150.34,67.13
A0  (via drill 0.41)
  Top 0.203: 23.97,41.41 21.59,41.41 POT1.2A | 23.97,41.41 28.42,41.41 28.89,41.89 30.32,41.89 JP4.2 | 23.97,41.41 23.97,38.23 26.99,35.22 52.39,35.22 53.98,36.81 53.98,39.98 57.94,43.95 66.04,43.95 73.82,51.73 75.25,51.73 81.44,57.92 81.44,58.24 v84.77,61.57 | v87.31,61.57 87.31,61.89 88.42,63 95.57,63 96.2,62.37 v102.71,62.37 | v113.03,67.29 v112.08,68.24
  Bottom 0.203: 130.97,68.24 129.86,67.13 124.3,67.13 123.51,67.92 SERIAL1.5 | 130.97,68.24 132.56,69.83 139.86,69.83 141.29,71.25 SERIAL2.5 | 130.97,68.24 143.35,68.24 164.94,46.65 168.59,46.65 172.09,43.16 U1.A0 | v87.31,61.57 v84.77,61.57 | v102.71,62.37 103.35,63 105.25,63 109.06,66.81 110.65,66.81 v112.08,68.24 | v113.03,67.29 113.82,68.08 SERIAL3.5
  Bottom 0.406: SERIAL3.5 SERIAL1.5
A1  (via drill 0.41)
  Top 0.203: v168.43,47.92 168.43,44.27 169.54,43.16 U1.A1
  Bottom 0.203: v168.43,47.92 168.43,83 171.45,86.02 202.72,86.02 203.84,87.13 CONF-A1.2
A2  (via drill 0.41)
  Top 0.203: v149.86,36.17 146.21,36.17 144.3,38.08 135.89,38.08 v133.03,35.22 | v119.22,30.77 v123.67,35.22 | v88.42,54.59 94.14,48.87 94.14,48.71 96.36,46.49 97,46.49 102.87,40.62 102.87,39.66 v111.6,30.93 | v11.59,23.95 10.32,22.68 9.68,22.68 2.54,29.82 2.54,31.73 | 2.54,31.73 1.75,32.52 U$34.A2 | 2.54,31.73 2.54,34.58 4.6,36.65 v4.6,43.79 4.6,45.06 11.11,51.57 11.11,67.13 v11.91,67.92 v11.91,82.37 | v16.67,81.89 19.37,84.59 v19.37,89.83 21.43,91.89 62.71,91.89 71.28,83.32 71.28,77.61 74.93,73.95 74.93,60.94 78.74,57.13 v78.74,56.81
  Bottom 0.203: v149.86,36.17 148.75,36.17 IC3.3 | v123.67,35.22 v133.03,35.22 | v119.22,30.77 114.62,30.77 IC1.17 114.46,30.93 v111.6,30.93 | 85.88,56.81 85.88,56.49 87.79,54.59 v88.42,54.59 | 85.88,56.81 85.88,58.24 IC8.17 | v11.59,23.95 13.02,23.95 IC2.3 | v4.6,43.79 5.56,44.74 6.51,44.74 IC6.17 | v11.91,67.92 12.54,67.29 13.02,67.29 IC4.3 | v11.91,82.37 12.06,82.21 14.92,82.21 15.08,82.05 IC5.3 15.24,82.05 16.51,82.05 v16.67,81.89 | v19.37,89.83 23.34,93.8 24.92,93.8 24.92,92.69 IC7.17 | v78.74,56.81 85.88,56.81
A3
  Top 0.203: ANLGDAISY-MAIN.2 147.64,51.25 147.64,50.62 153.03,45.22 153.03,42.52 153.83,41.73 163.19,41.73 164.47,43 U1.A3
A4
  Bottom 0.203: ANLGDAISY-MAIN.3 145.1,48.71 149.54,44.27 151.29,44.27 153.83,41.73 160.66,41.73 161.93,43 U1.A4
A5
  Top 0.203: ANLGDAISY-MAIN.4 145.1,51.41 145.73,51.41 147,52.68 149.54,52.68 159.07,43.16 159.38,43.16 U1.A5
A12  (via drill 0.41)
  Top 0.203: U1.A12 139.22,43.16 139.22,48.08 139.86,48.71 ANLGDAISY-MAIN.7 140.02,48.87 141.29,50.14 143.19,50.14 143.83,50.78 143.83,52.05 148.91,57.13 v148.91,60.62
  Bottom 0.203: v148.91,60.62 148.59,60.62 146.84,62.37 JOYSTICKS.2
A13
  Top 0.203: U1.A13 136.68,43.16 136.68,48.08 139.86,51.25 ANLGDAISY-MAIN.8 140.02,51.41 144.15,55.54 144.15,59.83 JOYSTICKS.3
A14
  Bottom 0.203: U1.A14 134.14,43.16 138.59,47.6 141.29,47.6 142.4,48.71 ANLGDAISY-MAIN.5 142.56,48.87 143.83,48.87 143.83,51.89 143.03,52.68 141.76,52.68 141.76,59.83 JOYSTICKS.5
A15
  Top 0.203: JOYSTICKS.6 141.76,62.52 142.56,62.52 143.83,63.79 147.16,63.79 148.11,62.84 148.11,56.97 142.56,51.41 ANLGDAISY-MAIN.6
  Bottom 0.203: U1.A15 131.6,43.16 138.59,50.14 141.29,50.14 142.4,51.25 ANLGDAISY-MAIN.6
AD0  (via drill 0.41)
  Top 0.203: v96.04,51.73 101.6,57.28 SW1.E | v113.98,51.73 116.2,53.95 U$66.4
  Bottom 0.203: C26.1 101.92,59.19 101.92,57.44 101.76,57.44 SW1.E | IC8.1 93.03,51.09 93.66,51.73 v96.04,51.73 v113.98,51.73
AN2
  Bottom 0.203: ANLGDAISY-MAIN.1 147.64,48.71 152.08,44.27 165.89,44.27 167,43.16 U1.A2
D2  (via drill 0.41)
  Top 0.203: v88.42,59.67 88.42,58.08 96.68,49.82 96.68,47.76 103.03,41.41 105.89,41.41 v109.06,44.59
  Bottom 0.203: v88.42,59.67 88.42,58.4 IC8.21 | v109.06,44.59 109.54,45.06 110.81,45.06 IC9.12
D3  (via drill 0.41)
  Top 0.203: v92.08,59.67 92.39,59.67 92.87,59.19 104.3,59.19 v105.09,59.98 | SW1.A 106.68,71.73 109.06,69.35 109.22,69.35 113.98,64.59 113.98,58.87 116.2,56.65 U$66.3
  Bottom 0.203: U$66.3 116.2,56.65 113.82,59.03 108.11,59.03 106.36,60.78 C25.1 106.2,60.78 105.89,60.78 v105.09,59.98 | v92.08,59.67 89.22,59.67 89.22,58.4 IC8.22
D22  (via drill 0.41)
  Top 0.203: v150.34,85.54 v169.23,66.65
  Bottom 0.203: v169.23,66.65 169.23,49.82 174.78,44.27 201.14,44.27 201.45,43.95 R7.2 | v150.34,85.54 147.96,87.92 129.86,87.92 129.06,88.72 U1.22
D23  (via drill 0.41)
  Top 0.203: v140.97,76.97 136.37,81.57 v136.37,85.07
  Bottom 0.203: v140.97,76.97 151.13,76.97 151.13,64.27 168.28,47.12 169.86,47.12 175.26,41.73 201.45,41.73 203.52,43.79 R8.2 | v136.37,85.07 133.99,87.45 127.79,87.45 126.52,88.72 U1.23
D37  (via drill 0.41)
  Top 0.203: v140.02,76.97 v137.32,74.27
  Bottom 0.203: 205.42,87.13 204.95,87.13 CONF-A1.1 | 205.42,87.13 206.38,87.13 207.01,86.5 R9.2 207.17,86.34 210.19,83.32 210.98,83.32 CONF.3 | v137.32,74.27 136.37,74.27 131.76,69.67 127.79,69.67 126.52,70.94 U1.37 | v140.02,76.97 142.72,79.67 164.47,79.67 173.04,88.24 204.31,88.24 205.42,87.13
GND  (via drill 0.51)  (1 unrouted)
  Top 0.203: v5.87,42.68 5.87,33.63 v8.89,30.61
  Top 0.254: 208.44,76.81 206.22,76.81 203.71,74.3 203.71,51.57 203.84,51.44
  Top 0.356: v123.67,29.34 123.67,25.06 123.83,24.9 B7.P$4 123.83,24.74 123.83,21.73 124.62,20.93 v124.62,20.3 | v146.84,27.76 146.84,24.9 B8ALT.P$4 | v154.78,21.09 154.78,24.58 154.46,24.9 B9.P$4 | U$7.P$1 217.96,9.5 217.96,14.74 207.8,24.9 B12ALT.P$4 | v78.58,21.09 78.58,24.58 78.26,24.9 B4.P$4 78.11,25.06 78.11,30.46 71.12,37.44 71.12,39.35 JP3.1 | 117.63,17.12 117.63,23.63 116.36,24.9 B6ALT.P$4 | 117.63,17.12 117.63,16.8 116.05,15.22 116.05,9.5 U$15.P$1 | v14.29,16.8 14.29,16.49 9.92,12.12 | 9.92,12.12 7.3,9.5 5.08,9.5 U$20.P$1 | 9.92,12.12 1.75,20.3 1.75,30.46 U$34.L3 | v122.08,19.34 119.86,17.12 117.63,17.12 | U1.GND@3 126.52,48.08 128.91,48.08 U1.GND@2 | JOYSTICKS.8 139.22,62.52 139.22,64.11 146.37,71.25 SERIAL2.1 | UART1.5 143.19,81.57 143.19,79.03 147.96,74.27 147.96,72.84 146.53,71.41 SERIAL2.1 | 209.71,80.14 210.98,80.14 RESET.1 | 209.71,80.14 208.6,80.14 RESETA.1 208.44,79.99 208.44,76.81 | 209.71,80.14 209.71,83.8 210.98,85.07 210.98,88.24 CONF.1 | 181.13,43 182.25,43 U1.GND@0 | 181.13,43 179.86,43 U1.GND@1 | 181.13,43 v181.13,45.06 173.67,45.06 147,71.73 SERIAL2.1 | 204.31,51.25 205.58,49.98 U$1.K1 | JP4.1 32.38,41.41 32.38,46.49 B13.P$4 | v93.82,42.68 93.82,46.17 93.5,46.49 B17.P$4 | B18.P$4 108.58,46.49 106.68,48.4 106.68,57.28 SW1.D 106.68,57.44 106.68,66.49 108.27,68.08 B24.P$4 | U$21.P$1 5.08,89.35 8.1,89.35 16.35,81.1 v16.35,74.91 16.35,71.25 14.21,69.11 | 12.22,60.78 12.22,67.13 14.21,69.11 | 12.22,60.78 v12.22,46.17 | v11.91,60.78 12.22,60.78 | v33.5,63.48 33.5,67.13 32.54,68.08 B19.P$4 | v78.74,63.48 78.74,67.6 78.26,68.08 B22.P$4 | 117.47,89.51 117.47,91.73 116.05,93.16 U$18.P$1
  Top 0.356: 117.47,89.51 PC2.- | SSW2.1 110.97,83.16 117.32,89.51 117.47,89.51 | B23.P$4 100.33,68.08 103.98,71.73 SW1.C 104.14,71.89 v101.44,74.59 101.28,74.59 100.17,75.7 96.36,75.7 SSW2.3 96.2,75.7 95.09,74.59 93.98,74.59 93.5,75.06 93.5,75.22 93.27,75.46 | 93.27,75.46 91.44,77.29 91.44,83 SSW1.1 | B26.P$4 38.58,75.7 v36.51,77.76 36.51,77.92 32.54,81.89 32.54,83.32 B25.P$4 | SSW1.3 76.99,75.7 B29.P$4 84.45,75.54 85.88,74.11 91.92,74.11 93.27,75.46 | v60.64,88.4 60.64,86.5 63.02,84.11 63.02,77.13 62.79,76.89 | 62.79,76.89 61.59,75.7 B27ALT.P$4 | B21.P$4 62.87,68.08 62.87,76.81 62.79,76.89 | v14.13,69.19 14.21,69.11 | v123.67,90.46 123.67,78.4 123.51,78.24 SERIAL1.1
  Bottom 0.203: v5.87,42.68 5.4,42.68 5.4,43.79 5.71,44.11 6.51,44.11 IC6.16 | v8.89,30.61 7.14,28.87 6.99,28.87 6.91,28.79
  Bottom 0.305: C21.1 25.57,83.87 26.16,84.46 26.16,85.38 IC7.10 | IC6.10 15.25,46.13 C15.1 | C30.1 86.53,49.2 87.12,49.79 87.12,50.97 IC8.10 | C4.1 123.41,31.54 122.81,32.14 121.76,32.14 IC1.10
  Bottom 0.356: IC3.2 148.75,36.81 148.75,37.28 IC3.1 148.59,37.44 145.89,37.44 | 145.89,37.44 144.62,38.71 C8.2 | IC3.23 142.88,34.11 142.24,34.11 141.92,34.42 141.92,35.38 142.88,35.38 IC3.25 143.03,35.38 145.89,35.38 | 147.96,29.03 148.43,29.03 148.59,28.87 IC3.14 | 147.96,29.03 147.8,29.19 147.8,34.74 148.59,34.74 IC3.5 148.75,34.9 148.75,35.38 IC3.4 148.59,35.38 145.89,35.38 | 145.89,35.38 145.89,37.44 | v123.67,29.34 123.67,31.41 C4.1 | B7.P$4 123.98,24.9 124.14,25.06 131.44,25.06 B7ALT.P$4 131.6,24.9 131.76,25.06 138.91,25.06 139.06,24.9 B8.P$4 139.06,25.06 146.53,25.06 146.69,24.9 B8ALT.P$4 146.84,24.9 147,25.06 154.31,25.06 B9.P$4 154.46,24.9 154.62,25.06 161.93,25.06 B9ALT.P$4 162.08,24.9 162.24,25.06 169.39,25.06 169.54,24.9 B10.P$4 169.54,25.06 177.01,25.06 177.16,24.9 B10ALT.P$4 177.16,25.06 184.63,25.06 184.78,24.9 B11.P$4 184.78,25.06 192.25,25.06 192.41,24.9 B11ALT.P$4 192.41,25.06 199.87,25.06 200.03,24.9 B12.P$4 200.03,25.06 207.49,25.06 207.65,24.9 B12ALT.P$4 | v146.84,27.76 147.96,28.87 147.96,29.03 | v154.78,21.09 154.46,21.09 153.67,20.3 C18.2 | C16.2 126.05,10.93 124.62,9.5 116.05,9.5 U$15.P$1 | v78.58,21.09 78.26,21.09 77.47,20.3 C17.2 | IC1.16 114.46,30.14 114.46,29.66 IC1.15 114.3,29.66 113.19,28.55 102.39,28.55 101.12,27.28 101.12,24.9 B5ALT.P$4 | B5ALT.P$4 101.28,25.06 108.43,25.06 108.58,24.9 B6.P$4 108.58,25.06 116.05,25.06 116.2,24.9 B6ALT.P$4 | B5ALT.P$4 100.97,25.06 93.66,25.06 93.5,24.9 B5.P$4 93.34,24.9 93.19,25.06 86.04,25.06 85.88,24.9 B4ALT.P$4 85.72,25.06 78.42,25.06 78.26,24.9 B4.P$4 78.11,25.06 70.48,25.06 B3ALT.P$4 70.48,24.9 70.33,25.06 62.87,25.06 B3.P$4 62.87,24.9 62.71,25.06 55.24,25.06 B2ALT.P$4 55.24,24.9 55.09,25.06 47.62,25.06 B2.P$4 47.62,24.9 47.47,25.06 40.01,25.06 B1ALT.P$4 40.01,24.9 39.85,25.06 32.7,25.06 32.54,24.9 B1.P$4 32.38,25.06 13.18,25.06
  Bottom 0.356: v14.29,16.8 13.18,16.8 IC2.14 | 6.35,23.31 6.35,22.36 6.67,22.04 7.14,22.04 IC2.23 | 6.35,23.31 7.14,23.31 IC2.25 | 13.18,25.06 13.18,25.22 IC2.1 13.02,25.38 11.43,26.96 8.89,26.96 C5.2 8.73,26.96 6.91,28.79 6.27,29.42 | 13.18,25.06 13.18,24.74 IC2.2 | 6.27,29.42 5.24,30.46 3.81,30.46 U$34.L2 3.65,30.46 1.75,30.46 U$34.L3 | 6.35,23.31 6.35,26.01 6.19,26.17 6.19,29.34 6.27,29.42 | v124.62,20.3 123.67,19.34 v122.08,19.34 | U1.GND@2 129.06,48.24 130.65,48.24 134.78,52.36 C2.2 134.94,52.52 136.68,52.52 C1.2 136.84,52.68 137.64,53.48 137.64,58.71 135.89,58.71 135.57,59.03 135.57,60.46 137.32,60.46 139.22,62.37 JOYSTICKS.8 | U1.GND@4 196.69,91.26 199.07,88.88 210.5,88.88 210.98,88.4 CONF.1 | U$1.K1 205.58,49.82 205.58,49.19 203.36,46.97 201.29,46.97 200.82,46.49 186.06,46.49 184.78,45.22 C3.2 184.63,45.22 182.56,45.22 C6.2 182.4,45.06 v181.13,45.06 | JP4.4 30.48,46.97 31.91,46.97 32.38,46.49 B13.P$4 32.54,46.49 32.7,46.65 47.62,46.65 B14.P$4 47.78,46.49 47.94,46.65 55.09,46.65 55.24,46.49 B14ALT.P$4 55.24,46.65 62.71,46.65 62.87,46.49 B15.P$4 63.02,46.49 66.75,42.76 | JP4.1 31.27,40.3 36.67,40.3 38.1,41.73 C19.2 | 66.75,42.76 67.63,41.89 68.58,41.89 70.96,39.51 JP3.1 | 66.75,42.76 JP3.4 73.18,49.19 75.56,49.19 78.11,46.65 B16.P$4 78.26,46.49 79.69,45.06 79.85,45.06 POT1.3 80.01,45.06 80.17,45.06 84.14,49.03 C30.1 86.52,48.87 88.74,46.65 93.34,46.65 B17.P$4 93.5,46.49 93.66,46.65 100.81,46.65 100.97,46.49 B17ALT.P$4 101.12,46.49 101.6,46.97 107.95,46.97 108.43,46.49 B18.P$4 108.58,46.49 108.58,45.22 108.27,44.9 108.27,43.79 110.81,43.79 IC9.11 110.97,43.79 111.44,43.31 112.08,43.31 113.27,42.12
  Bottom 0.356: v93.82,42.68 93.5,42.68 92.71,41.89 C20.2 | C26.2 106.2,59.19 C25.2 106.2,59.03 106.2,57.44 106.52,57.44 SW1.D 106.68,57.13 107.16,56.65 113.67,56.65 U$66.1 | C27.2 117,49.51 117,47.76 IC9.1 116.84,47.6 116.36,47.12 115.73,47.12 115.57,46.97 115.57,44.74 115.73,44.74 115.73,44.59 | 114.3,40.46 112.39,40.46 111.6,41.25 110.97,41.25 IC9.9 | 114.3,40.46 116.52,40.46 116.84,40.14 IC9.7 | 114.54,40.85 114.3,40.62 114.3,40.46 | 114.54,40.85 115.73,42.05 116.36,42.05 116.84,42.52 IC9.5 | 114.54,40.85 113.27,42.12 | 115.73,44.59 116.36,44.59 116.84,45.06 IC9.3 | 113.27,42.12 115.73,44.59 | IC7.15 23.65,92.53 23.65,87.61 24.92,87.61 26.19,86.34 26.19,85.54 IC7.10 | 8.26,81.26 8.26,81.42 9.21,81.42 IC5.25 9.37,81.42 9.84,81.42 10,81.57 14.29,81.57 14.45,81.42 15.08,81.42 IC5.4 15.24,81.26 15.24,81.1 | 8.26,81.26 8.26,80.46 8.57,80.14 9.21,80.14 IC5.23 | 15.24,81.1 15.24,80.78 IC5.5 | 16.83,82.69 16.99,82.69 17.46,82.21 | 16.83,82.69 15.24,82.69 IC5.2 | 17.46,82.21 17.46,81.1 15.24,81.1 | C14.2 11.11,84.75 11.91,83.95 15.72,83.95 16.83,82.84 16.83,82.69 | 17.46,82.21 24.13,82.21 25.56,83.64 C21.1 | IC4.25 7.14,66.49 6.35,66.49 6.35,65.54 6.67,65.22 7.14,65.22 IC4.23 7.3,65.22 8.26,65.22 8.26,64.27 11.83,60.7 | 11.83,60.7 12.38,60.14 12.86,60.14 13.02,59.98 IC4.14 | v16.35,74.91 15.24,74.91 IC5.14 | v12.22,46.17 13.65,46.17 IC6.10 | v11.91,60.78 11.83,60.7 | 8.26,81.26 6.19,81.26 5.08,82.37 5.08,89.35 U$21.P$1 | 13.97,69.19 13.97,69.98 C9.2 | 13.97,69.19 13.97,68.24 | 13.97,68.24 13.97,68.08 13.81,67.92 13.18,67.92 IC4.2 | v33.5,63.48 34.13,63.48 34.61,63 C13.2 | 13.97,68.24 32.23,68.24 32.38,68.08 B19.P$4 32.54,68.08 32.7,68.24 47.62,68.24 B20.P$4 47.78,68.08 47.94,68.24 55.09,68.24 55.24,68.08 B20ALT.P$4 55.24,68.24 62.71,68.24 62.87,68.08 B21.P$4 62.87,68.24 70.33,68.24 70.48,68.08 B21ALT.P$4 70.48,68.24 77.95,68.24 78.11,68.08 B22.P$4
  Bottom 0.356: v78.74,63.48 79.38,63.48 79.85,63 C12.2 | SERIAL3.1 115.73,78.24 110.97,83 SSW2.1 110.81,83.16 108.9,83.16 108.74,83.32 B30.P$4 108.58,83.48 106.84,85.22 98.74,85.22 96.52,83 91.44,83 SSW1.1 | B24.P$4 107.63,68.08 106.36,69.35 C24.2 106.2,69.51 103.98,71.73 SW1.C | v101.44,74.59 100.65,74.59 100.17,75.06 C23.2 | v36.51,77.76 35.4,77.76 35.08,78.08 C11.2 | B26.P$4 38.73,75.7 38.89,75.54 46.04,75.54 46.2,75.7 B26ALT.P$4 46.35,75.7 46.51,75.54 53.66,75.54 53.82,75.7 B27.P$4 57.78,75.7 57.94,75.54 61.59,75.54 B27ALT.P$4 61.59,75.7 61.75,75.54 68.9,75.54 69.06,75.7 B28.P$4 69.22,75.54 76.68,75.54 76.83,75.7 SSW1.3 | C22.2 80.64,75.06 81.28,75.7 B29.P$4 84.14,75.86 84.14,78.08 C10.2 | v60.64,88.4 60.64,89.67 C7.2 | v14.13,69.19 13.97,69.19 | v123.67,90.46 127.16,93.96 156.53,93.96 156.53,88.08 148.75,80.3 144.46,80.3 143.19,81.57 UART1.5
  Bottom 0.406: SERIAL3.1 SERIAL1.1
  pour Top: 0,-0.5 223.52,-0.5 223.52,99.83 0,99.83
  pour Bottom: 0,-0.5 223.52,-0.5 223.52,99.83 0,99.83
GPA0  (via drill 0.41)
  Top 0.203: v117,33.47 117,35.54 v119.06,37.6 | v120.33,38.23 126.68,38.23 137.79,27.12 137.79,18.55 139.06,17.28 B8.P$5
  Bottom 0.203: v117,33.47 114.62,33.47 IC1.21 | v119.06,37.6 119.7,38.23 v120.33,38.23 | B8ALT.P$5 143.99,17.28 143.83,17.12 139.38,17.12 139.22,17.28 B8.P$5
GPA0_2  (via drill 0.41)
  Top 0.203: v77.95,84.11 82.23,79.83 82.23,78.72 83.98,76.97 87.15,76.97 88.58,75.54 91.28,75.54 SSW1.2
  Bottom 0.203: v77.95,84.11 75.09,86.97 47.78,86.97 46.2,88.56 27.62,88.56 27.62,92.53 IC7.21
GPA1  (via drill 0.41)
  Top 0.203: v119.22,33.31 117.16,31.25 117.16,27.92 117,27.76 117,27.12 119.22,24.9 119.86,24.9 123.83,20.93 123.83,17.28 B7.P$5
  Bottom 0.203: v119.22,33.31 118.27,34.27 116.84,34.27 116.68,34.11 114.62,34.11 IC1.22 | B7.P$5 B7ALT.P$5
GPA1_2  (via drill 0.41)
  Top 0.203: v94.14,92.21 96.68,92.21 107.79,81.1 v107.79,80.3
  Bottom 0.203: v94.14,92.21 37.62,92.21 36.99,91.58 28.26,91.58 28.26,92.53 IC7.22 | v107.79,80.3 111.12,76.97 111.12,75.54 110.97,75.54 SSW2.2
GPA2  (via drill 0.41)
  Top 0.203: v112.39,33.47 112.39,28.23 111.6,27.44 111.6,25.22 109.38,23 109.38,17.91 108.74,17.28 B6.P$5
  Bottom 0.203: v112.39,33.47 113.67,34.74 114.46,34.74 IC1.23 | B6.P$5 B6ALT.P$5
GPA3  (via drill 0.41)
  Top 0.203: v103.35,30.3 99.54,26.49 99.54,18.71 100.97,17.28 B5ALT.P$5
  Bottom 0.203: v103.35,30.3 107.47,30.3 112.55,35.38 114.46,35.38 IC1.24 | B5ALT.P$5 B5.P$5
GPA4  (via drill 0.41)
  Top 0.203: v68.26,33.95 59.21,24.9 57.15,24.9 52.07,19.82 42.7,19.82 40.16,17.28 B1ALT.P$5
  Bottom 0.203: v68.26,33.95 68.74,34.42 110.01,34.42 111.6,36.01 114.46,36.01 IC1.25 | B1ALT.P$5 B1.P$5
GPA5  (via drill 0.41)
  Top 0.203: v109.86,33.63 v113.03,36.81 | v72.23,33.47 69.37,33.47 59.69,23.79 59.69,20.61 58.9,19.82 57.94,19.82 55.4,17.28 B2ALT.P$5
  Bottom 0.203: v113.03,36.81 114.46,36.81 IC1.26 | v109.86,33.63 109.06,32.84 93.66,32.84 93.5,33 89.22,33 89.06,32.84 88.74,32.84 88.11,33.47 v72.23,33.47 | B2ALT.P$5 B2.P$5
GPA6  (via drill 0.41)
  Top 0.203: v104.46,36.81 102.87,38.39 102.55,38.39 89.06,24.9 88.42,24.9 82.55,19.03 82.55,18.07 80.49,16.01 71.91,16.01 70.64,17.28 B3ALT.P$5
  Bottom 0.203: v104.46,36.81 109.06,36.81 109.86,37.6 113.19,37.6 113.35,37.44 114.46,37.44 IC1.27 | B3ALT.P$5 B3.P$5
GPA7  (via drill 0.41)
  Top 0.203: v102.71,37.6 90.17,25.06 90.17,20.61 89.38,19.82 88.42,19.82 85.88,17.28 B4ALT.P$5
  Bottom 0.203: v102.71,37.6 109.22,37.6 109.7,38.08 114.46,38.08 IC1.28 | B4ALT.P$5 B4.P$5
GPA8  (via drill 0.41)
  Top 0.203: v117.63,39.03 117.63,44.27 v111.76,50.14 | v93.34,48.71 93.34,48.24 90.17,45.06 90.17,42.2 89.38,41.41 85.72,41.41 82.87,44.27 82.55,44.27 78.26,39.98 78.26,38.87 B16.P$5
  Bottom 0.203: v117.63,39.03 120.65,39.03 121.6,38.08 IC1.1 | v111.76,50.14 94.77,50.14 v93.34,48.71
GPA9  (via drill 0.41)
  Top 0.203: v133.03,34.27 v128.91,38.39 | v119.38,27.6 v125.73,33.95 | v100.33,26.33 v101.92,26.33 | v84.77,29.5 80.17,29.5 v71.91,37.76
  Bottom 0.203: v128.91,38.39 123.51,38.39 122.56,37.44 121.76,37.44 IC1.2 | v133.03,34.27 132.72,33.95 v125.73,33.95 | v119.38,27.6 119.38,26.33 v101.92,26.33 | v100.33,26.33 97.16,29.5 v84.77,29.5 | v71.91,37.76 71.6,38.08 63.82,38.08 63.02,38.87 B15.P$5
GPA10  (via drill 0.41)
  Top 0.203: v107.63,36.01 v110.49,38.87
  Bottom 0.203: v110.49,38.87 115.09,38.87 117.16,36.81 121.6,36.81 IC1.3 | v107.63,36.01 106.52,34.9 60.01,34.9 56.04,38.87 B14ALT.P$5 B14.P$5
GPA11  (via drill 0.41)
  Top 0.203: v115.89,36.17 114.14,36.17 111.28,33.31 v111.28,32.36 | v110.17,31.25 107.47,31.25 v107.31,31.41 | v40.64,33.95 v42.39,32.2
  Bottom 0.203: v115.89,36.17 121.6,36.17 IC1.4 | v110.17,31.25 v111.28,32.36 | v107.31,31.41 82.55,31.41 81.76,32.2 v42.39,32.2 | v40.64,33.95 35.72,38.87 B13.P$5
GPA12  (via drill 0.41)
  Top 0.203: v120.17,35.38 116.68,31.88 116.68,30.46 116.52,30.3 116.52,26.65 v118.27,24.9 | v134.46,26.17 137.32,23.31 137.32,17.28 138.75,15.85 145.1,15.85 145.26,15.69 148.11,15.69 149.7,17.28 B9.P$5 B9ALT.P$5
  Bottom 0.203: v120.17,35.38 121.6,35.38 IC1.5 | v118.27,24.9 118.59,25.22 122.4,25.22 123.35,26.17 v134.46,26.17
GPA13  (via drill 0.41)
  Top 0.203: v138.91,26.96 v128.27,37.6 | v158.59,26.17 158.59,25.85 164.62,19.82 167,19.82 169.54,17.28 B10.P$5 B10ALT.P$5
  Bottom 0.203: v128.27,37.6 127,37.6 126.52,37.12 122.87,37.12 122.87,35.06 122.71,34.9 121.76,34.9 IC1.6 | v138.91,26.96 139.7,26.17 v158.59,26.17
GPA14  (via drill 0.41)
  Top 0.203: v119.22,32.36 119.22,31.73 118.43,30.93 118.43,30.46 v119.86,29.03 | v130.81,28.55 134.46,24.9 135.1,24.9 136.53,23.47 136.53,17.44 140.34,13.63 176.53,13.63 180.18,17.28 B11.P$5 B11ALT.P$5
  Bottom 0.203: v119.22,32.36 120.97,34.11 121.6,34.11 IC1.7 | v119.86,29.03 120.33,28.55 v130.81,28.55
GPA15  (via drill 0.41)
  Top 0.203: v130.81,29.5 130.02,28.71 130.02,21.41 135.57,15.85 137.48,15.85 140.18,13.15 191.29,13.15 195.42,17.28 B12.P$5
  Bottom 0.203: v130.81,29.5 129.22,29.5 124.62,34.11 122.87,34.11 122.87,33.79 122.56,33.47 121.76,33.47 IC1.8 | B12.P$5 B12ALT.P$5
GPA16  (via drill 0.41)
  Top 0.203: v5.08,47.44 5.08,48.4 4.29,49.19 v4.29,60.14 | v2.7,66.02 2.7,86.97 1.59,88.08 1.59,90.78 3.81,93 96.52,93 v109.22,80.3
  Bottom 0.203: v5.08,47.44 6.51,47.44 IC6.21 | v4.29,60.14 4.29,64.43 v2.7,66.02 | v109.22,80.3 109.22,79.51 113.67,75.06 113.67,68.72 113.51,68.72 112.24,67.44 112.24,60.46 B24.P$5
GPA17  (via drill 0.41)
  Top 0.203: v8.89,44.9 v8.89,48.08 | v87.31,56.02 v85.09,53.79
  Bottom 0.203: v8.89,48.08 6.67,48.08 IC6.22 | v8.89,44.9 11.91,41.89 19.53,41.89 20.95,43.31 22.23,43.31 23.97,45.06 23.97,51.89 71.75,51.89 73.66,53.79 v85.09,53.79 | v87.31,56.02 88.42,57.13 93.34,57.13 93.5,57.28 93.5,60.46 B23.P$5
GPA18  (via drill 0.41)
  Top 0.203: v24.45,36.81 v22.86,38.39 | v26.04,37.12 33.34,37.12 44.13,47.92 62.23,47.92 66.52,52.2 75.09,52.2 79.53,56.65 79.53,56.97 78.26,58.24 78.26,60.46 B22.P$5
  Bottom 0.203: v22.86,38.39 22.23,38.39 19.37,41.25 6.19,41.25 4.29,43.16 3.81,43.16 3.81,47.12 5.4,48.71 6.51,48.71 IC6.23 | v24.45,36.81 24.77,37.12 v26.04,37.12
GPA19  (via drill 0.41)
  Top 0.203: v5.08,52.2 v5.08,49.35
  Bottom 0.203: v5.08,49.35 6.51,49.35 IC6.24 | v5.08,52.2 7.46,54.59 9.05,54.59 9.37,54.27 14.29,54.27 14.92,54.9 24.13,54.9 24.61,55.38 66.52,55.38 70.48,59.35 70.48,60.46 | 70.48,60.46 B21.P$5 | 70.48,60.46 B21ALT.P$5
GPA20  (via drill 0.41)
  Top 0.203: v93.34,32.2 93.34,38.87 B17.P$5 B17ALT.P$5
  Bottom 0.203: v93.34,32.2 88.74,32.2 87.95,33 73.82,33 73.5,32.68 72.07,32.68 71.6,33.16 26.19,33.16 21.91,37.44 2.7,37.44 2.7,47.92 4.92,50.14 6.51,50.14 IC6.25
GPA21  (via drill 0.41)
  Top 0.203: v94.14,84.59 94.14,75.54 v94.3,75.38 | v91.92,73 91.92,65.7 v92.55,65.06 | v107.47,53.79 107.47,49.51 109.86,47.12 109.86,39.98 108.74,38.87 B18.P$5
  Bottom 0.203: v94.14,84.59 94.14,86.18 95.73,87.77 97.16,87.77 97.16,91.1 92.71,95.54 0.64,95.54 0.64,84.27 1.91,83 1.91,54.43 5.56,50.78 6.51,50.78 IC6.26 | v91.92,73 v94.3,75.38 | v92.55,65.06 96.68,60.94 96.68,54.59 106.68,54.59 v107.47,53.79
GPA22  (via drill 0.41)
  Top 0.203: v19.21,52.84 19.84,52.84 27.46,60.46 B19.P$5
  Bottom 0.203: v19.21,52.84 18.89,52.52 8.89,52.52 7.78,51.41 6.67,51.41 IC6.27
GPA23  (via drill 0.41)
  Top 0.203: v22.86,53.63 26.04,56.81 41.91,56.81 45.56,60.46 B20.P$5
  Bottom 0.203: v22.86,53.63 19.05,53.63 18.41,53 7.62,53 6.67,52.05 IC6.28 | B20.P$5 B20ALT.P$5
GPA26  (via drill 0.41)
  Top 0.203: v82.07,65.06 v78.9,61.89
  Bottom 0.203: v78.9,61.89 77.79,61.89 76.36,60.46 73.5,60.46 65.88,52.84 20.16,52.84 18.1,50.78 13.81,50.78 IC6.3 | v82.07,65.06 86.52,69.51 98.11,69.51 100.33,71.73 100.33,73.8 106.68,73.8 108.58,75.7 B30.P$5
GPA27  (via drill 0.41)